# Altium PCB Control_Board_Model_C201_FFC_Sens_Conn.PcbDoc (part 10 of 12)
Units mil, origin at the board's own origin, x right, y up, seen from the top; angles counter-clockwise.
Board outline 3937.01 x 2755.91 mil, 6 copper layers (1-SIG-TOP, 2-GND, 3-PWR, 4-SIG-HOR, 5-SIG-VERT, 6-GND-BOT), stack 46.063 mil thick; 497 components, 379 nets, 1804 pads, 1610 vias.
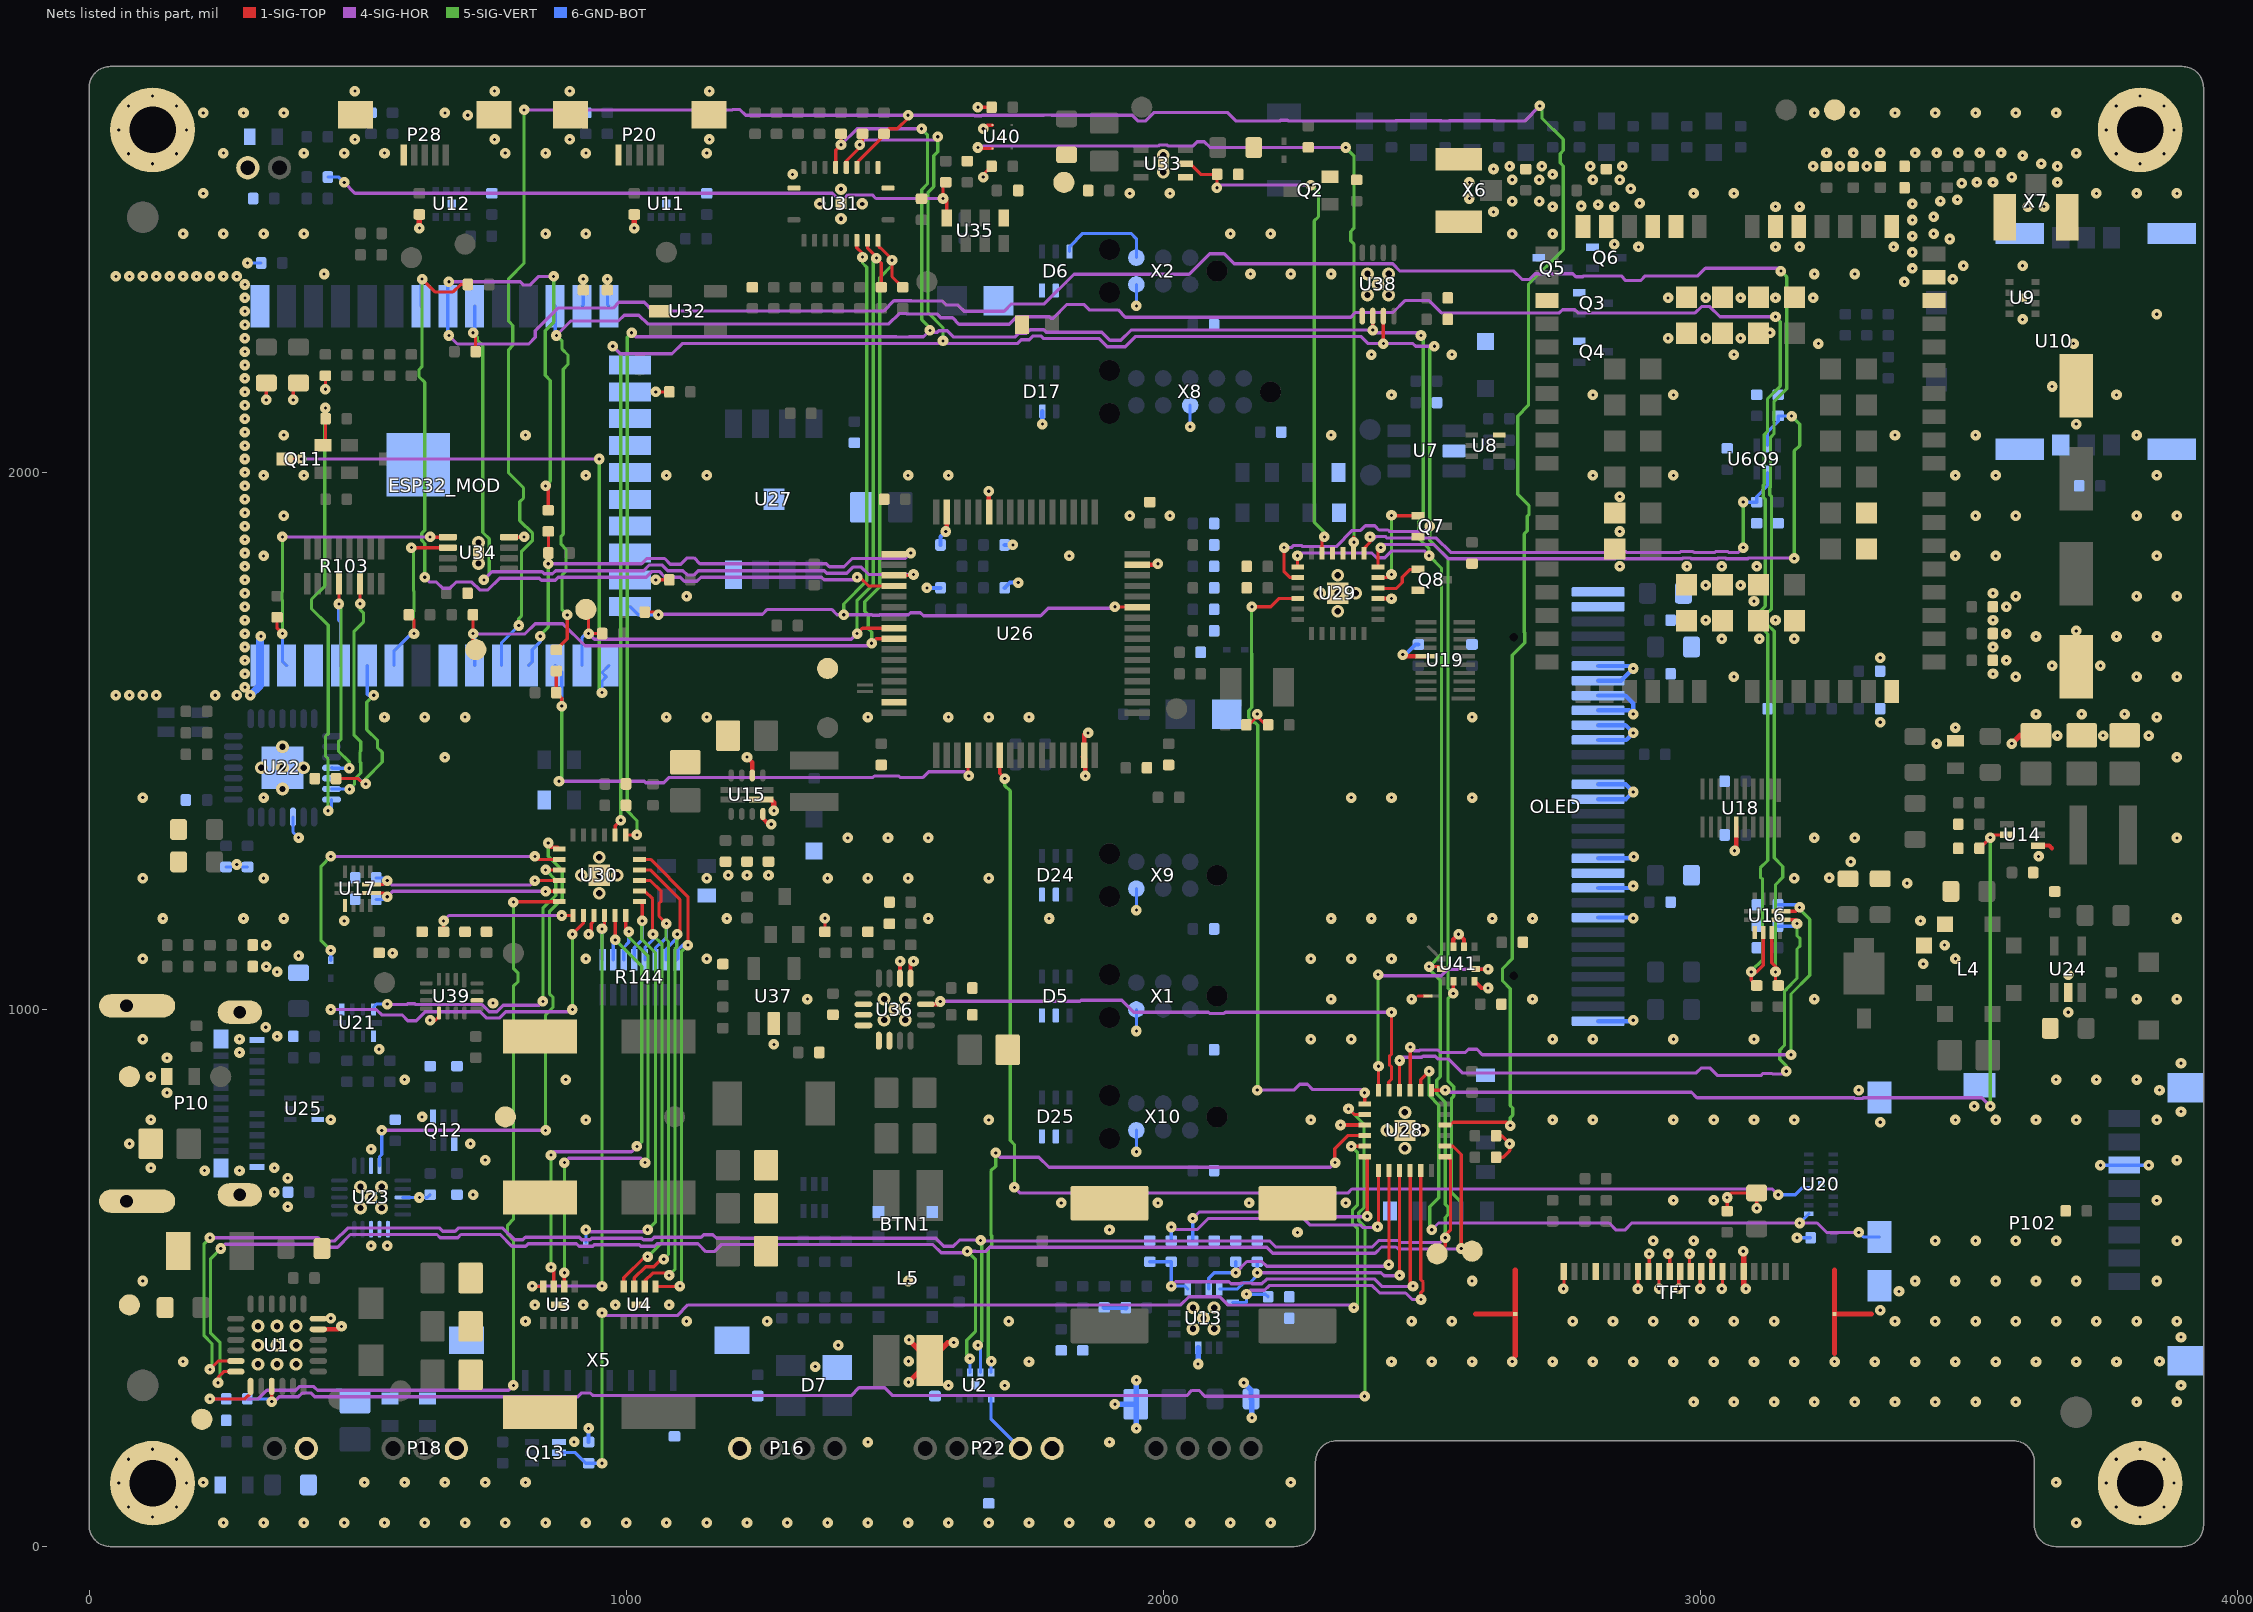
[diagram p9: the nets of this part, all layers, seen from the top]

## Via types
v1: diameter 19.68, hole 5.91, 1-SIG-TOP to 6-GND-BOT, tented both sides, 1553 vias
v2: diameter 23.81, hole 11.81, 1-SIG-TOP to 6-GND-BOT, tented both sides, 27 vias
v3: diameter 23.82, hole 11.81, 1-SIG-TOP to 6-GND-BOT, tented both sides, 26 vias
v4: diameter 21.65, hole 7.87, 1-SIG-TOP to 6-GND-BOT, tented both sides, 4 vias

## Nets (pads, with @x,y where several pads share a name; then routed paths per layer and width w, separated by ;. In a path a pad name is that pad's centre, name@x,y a point inside that pad or via, vN(x,y) a via of type N, cw(c..) or ccw(c..) an arc to the next point about the centre after c; other vN are vias at no path point) (continued)
DEBUG.RTS/TDO: D6.6 X2.6 | length 183
  6-GND-BOT w6: D6.6@1825.59,2411.22 1825.59,2420.59 1850,2445 1940,2445 1950,2435 X2.6@1950,2400
DIO_1_0: R97.2 U14.2 U28.1 | length 1617
  1-SIG-TOP w6: U28.1@2499.21,849.8 2524.8,849.8 v1(2525,850) ; R97.2@3519.68,1300 3519.68,1299.68 v1(3540,1320) 3540,1320.32 3544.68,1325 U14.2@3571.06,1325
  4-SIG-HOR w6: v1(2525,850) 2529.16,845.84 2983.63,845.84 2993.68,835.8 3286.87,835.8 3288.46,834.2 3301.54,834.2 3303.13,835.8 3524.2,835.8 v1(3540,820)
  5-SIG-VERT w6: v1(3540,820) v1(3540,1320)
DIO_1_1: P102.9 U20.1 U28.2 | length 1238.5
  1-SIG-TOP w6: U28.2@2479.53,849.8 2479.53,869.53 v1(2495,885)
  4-SIG-HOR w6: v1(2500,590) 2512.52,602.52 2830.14,602.52 2843.46,589.2 2859.2,589.2 2872.52,602.52 v1(3185,602.52) 3217.48,602.52 3235,585 3242.66,585 3243.46,584.2 3256.54,584.2 3257.34,585 v1(3295,585)
  5-SIG-VERT w6: v1(2495,885) 2495,840 2513,822 2513,649.65 2496.16,632.8 2496.16,593.84 v1(2500,590)
  6-GND-BOT w6: v1(3185,602.52) U20.1@3202.36,619.88 ; v1(3295,585) 3303.62,576.38 P102.9@3333.66,576.38
DIO_1_2: R38.1 U16.2 U28.3 | length 1177.5
  1-SIG-TOP w6: U28.3@2459.84,849.8 2460,849.96 v1(2460,930) ; U16.2@3150.59,1182.87 3177.87,1182.87 v1(3185,1190)
  4-SIG-HOR w6: v1(2460,930) 2466.83,923.17 2476.89,923.17 2478.52,924.8 2511.48,924.8 2516.28,920 2562.66,920 2568.46,925.8 2584.2,925.8 2594.32,915.68 v1(3168.84,915.68)
  5-SIG-VERT w6: v1(3168.84,915.68) 3168.84,1028.84 3203.84,1063.84 3203.84,1167.8 3185,1186.65 v1(3185,1190)
  6-GND-BOT w6: R38.1@3144.68,1195 3180,1195 v1(3185,1190)
DIO_1_3: R37.1 U16.1 U28.4 | length 1178.6
  1-SIG-TOP w6: v1(2440,905) 2440,894.68 2440.16,894.84 U28.4@2440.16,849.8 ; U16.1@3150.59,1167.13 3177.87,1167.13 3180,1165 v1(3180,1160)
  4-SIG-HOR w6: v1(2440,905) 2446.17,911.17 2481.86,911.17 2483.49,912.8 2506.51,912.8 2511.31,908 2530.42,908 2556.42,882 2992.52,882 3001.37,890.84 3018.63,890.84 3032.48,877 3112.52,877 3116.37,880.84 3133.63,880.84 3134.48,880 3155,880 v1(3160,885)
  5-SIG-VERT w6: v1(3160,885) 3160,895.05 3148,907.05 3148,924.32 3156.84,933.16 3156.84,1033.81 3160,1036.97 3160,1038.03 3180,1058.03 3180,1112.66 3185.8,1118.46 3185.8,1131.54 3180,1137.34 v1(3180,1160)
  6-GND-BOT w6: R37.1@3144.68,1155 3180,1155 v1(3180,1160)
DIO_1_4: U28.5 U36.3 | length 1031.9
  1-SIG-TOP w6: U28.5@2420.47,849.8 2420,850.28 2420,865 2425,870 2425,893.35 2421.16,897.2 2421.16,912.8 2425,916.65 v1(2425,995)
  1-SIG-TOP w8: U36.3@1558.07,1009.84 1579.84,1009.84 v1(1584.92,1014.92)
  4-SIG-HOR w6: v1(1584.92,1014.92) 1585.5,1015.5 1845,1015.5 1846.84,1017.34 1922.66,1017.34 1945,995 2084.26,995 2086.6,992.66 2113.4,992.66 2115.74,995 v1(2425,995)
DIO_1_5: U28.6 U41.5 | length 448.9
  1-SIG-TOP w6: U28.6@2400.79,849.8 v1(2400.79,894.21) ; U41.5@2582.09,1075.16 v1(2604.84,1075.16)
  4-SIG-HOR w6: v1(2400,1065) 2401.95,1063.05 2518.05,1063.05 2530.16,1075.16 v1(2604.84,1075.16)
  5-SIG-VERT w6: v1(2400,1065) 2400,895 v1(2400.79,894.21)
DIO_1_6: U28.7 U29.22 | length 1235.2
  1-SIG-TOP w6: v1(2165,1750) 2200,1750 2215.16,1765.16 U29.22@2250.2,1765.16 ; v1(2375,845) 2375.2,844.8 U28.7@2375.2,824.21
  4-SIG-HOR w6: v1(2175,850) 2243.37,850 2254.22,860.84 2268.63,860.84 2278.52,850.95 2369.05,850.95 v1(2375,845)
  5-SIG-VERT w6: v1(2165,1750) 2164.2,1749.2 2164.2,1663.46 2165,1662.66 2165,1562.34 2159.2,1556.54 2159.2,1543.46 2168.46,1534.2 2171.06,1534.2 2175.84,1529.43 2175.84,850.84 v1(2175,850)
DIO_1_7: R1.1 U1.9 U28.8 | length 2736.9
  1-SIG-TOP w6: v1(340,270) 340.16,269.84 U1.9@340.16,298.23 U1.9@340.16,298.82 ; v1(2345,815) 2355.47,804.53 U28.8@2375.2,804.53
  4-SIG-HOR w6: v1(340,270) 345,270 354.16,279.16 389.68,279.16 396.37,285.84 413.63,285.84 420.32,279.16 909.68,279.16 916.37,285.84 933.63,285.84 938.32,281.16 1418.82,281.16 1433.46,295.8 1481.54,295.8 1496.18,281.16 2043.82,281.16 2053.46,290.8 2066.54,290.8 2077.34,280 v1(2375,280)
  5-SIG-VERT w6: v1(2345,815) 2373.84,786.16 2373.84,631.18 2364.2,621.54 2364.2,606.64 2375.84,595 2375.84,280.84 v1(2375,280)
  6-GND-BOT w6: R1.1@294.69,275 335,275 v1(340,270)
DIO_1_8: U2.8 U28.10 | length 1157.6
  1-SIG-TOP w6: v1(2320,715) 2319.32,715.68 2319.32,740.96 2343.51,765.16 U28.10@2375.2,765.16
  4-SIG-HOR w6: v1(1688,733) 1696,725 1768.42,725 1787.26,706.16 2311.16,706.16 v1(2320,715)
  5-SIG-VERT w6: v1(1680,345) 1674.2,350.8 1674.2,554.73 1680.84,561.37 1680.84,578.63 1679.16,580.32 1679.16,699.48 1688,708.32 v1(1688,733)
  6-GND-BOT w6: U2.8@1679.53,324.02 1679.53,344.53 v1(1680,345)
DIO_1_9: Q13.2 R138.2 U28.11 | length 2134.3
  1-SIG-TOP w6: v1@2349.53,745.47 U28.11@2375.2,745.47
  4-SIG-HOR w6: v1(955,435) 960,430 1095,430 1115,450 2032.98,450 2047.98,465 2105,465 2120,450 2350,450 v1(2355,445)
  5-SIG-VERT w6: v1(955,155) v1(955,435) ; v1(2350,745) 2361.84,733.16 2361.84,636.15 2352.2,626.51 2352.2,601.67 2361.84,592.03 2361.84,451.84 v1(2355,445)
  6-GND-BOT w6: Q13.2@875.2,175 905,175 924.69,155.32 R138.2@930,155.32 954.69,155.32 v1(955,155)
DIO_1_10: R79.2 U28.12 | length 488.3
  1-SIG-TOP w6: U28.12@2375.2,725.79 2380,720.98 v1(2380,615)
  4-SIG-HOR w6: v1(2055,611.15) 2066.8,622.95 2265.72,622.95 2274.72,613.95 2378.95,613.95 v1(2380,615)
  6-GND-BOT w6: R79.2@2055,569.68 v1(2055,611.15)
DIO_1_11: R80.2 U28.13 | length 542.3
  1-SIG-TOP w6: v1(2398.94,595.59) 2398.94,592.63 2400.79,590.79 U28.13@2400.79,700.2
  4-SIG-HOR w6: v1(2015,595) 2019.69,590.31 2063.63,590.31 2084.28,610.95 2260.75,610.95 2272.75,598.95 2366.57,598.95 2371.37,594.16 2397.51,594.16 v1(2398.94,595.59)
  6-GND-BOT w6: R80.2@2015,569.68 v1(2015,595)
DIO_1_12: R88.2 U13.15 U28.14 | length 568.3
  1-SIG-TOP w6: v1@2420.47,525.47 U28.14@2420.47,700.2
  4-SIG-HOR w6: v1(2135,510) 2155.84,530.84 2183.63,530.84 2192.48,522 2417,522 v1(2420,525)
  6-GND-BOT w6: U13.15@2084.84,479.53 2084.84,499.84 2095,510 v1(2135,510) R88.2@2135,530.32
DIO_1_13: R87.2 U13.16 U28.15 | length 569.3
  1-SIG-TOP w6: v1@2440.16,505 U28.15@2440.16,700.2
  4-SIG-HOR w6: v1(2175,510) 2405.52,510 2411.37,504.16 2439.16,504.16 v1(2440,505)
  6-GND-BOT w6: U13.16@2104.53,479.53 2137.88,479.53 2149.86,491.51 2161.51,491.51 2175,505 v1(2175,510) R87.2@2175,530.32
DIO_1_14: C50.2 R80.1 U13.13 U28.16 | length 804.3
  1-SIG-TOP w6: v1@2459.84,480 U28.16@2459.84,700.2
  4-SIG-HOR w6: v1(2015,485) 2023,493 2122.52,493 2126.37,489.16 2144.68,489.16 2146.37,490.84 2163.63,490.84 2165.32,489.16 2183.63,489.16 2192.48,498 2393.97,498 2407.81,484.16 2464.16,484.16 v1(2465,485)
  6-GND-BOT w6: C50.2@1975,530.32 R80.1@2015,530.32 v1(2015,485) 2040,485 U13.13@2045.47,479.53
DIO_1_15: R85.2 U13.1 U28.17 | length 669.4
  1-SIG-TOP w6: U28.17@2479.53,700.2 2479.53,497.12 2483.84,492.8 2483.84,477.2 2479.53,472.88 2479.53,460.47 v1(2480,460)
  4-SIG-HOR w6: v1(2155,470) 2162.16,477.16 2188.6,477.16 2197.45,486 2389,486 2402.84,472.16 2451.22,472.16 2463.37,460 v1(2480,460)
  6-GND-BOT w6: U13.1@2129.53,454.53 2154.53,454.53 2155,455 v1(2155,470) 2190.31,470 R85.2@2195.31,465
DIO_2_8: Q8.1 U29.10 | length 95.6
  1-SIG-TOP w6: U29.10@2399.8,1784.84 2400.8,1783.84 2433.84,1783.84 2445,1795 2445,1804.9 2459.6,1819.5 Q8.1@2474.41,1819.5
DIO_2_9: Q7.1 U29.11 | length 187.1
  1-SIG-TOP w6: U29.11@2399.8,1804.53 2419.53,1804.53 v1(2425,1810) ; v1(2425,1920) 2425.5,1919.5 Q7.1@2474.41,1919.5
  5-SIG-VERT w6: v1(2425,1810) v1(2425,1920)
DIO_2_10: Q9.5 R58.2 U29.12 | length 1190.4
  1-SIG-TOP w6: U29.12@2399.8,1824.21 2399.8,1854.8 v1(2405,1860)
  4-SIG-HOR w6: v1(2405,1860) 2410.84,1865.84 2503.63,1865.84 2530.32,1839.16 2841.82,1839.16 2843.46,1840.8 2856.54,1840.8 2858.18,1839.16 2966.82,1839.16 2968.46,1840.8 2981.54,1840.8 2983.18,1839.16 3031.82,1839.16 3033.46,1840.8 3046.54,1840.8 3048.18,1839.16 3088.63,1839.16 3090.27,1840.8 3174.2,1840.8 v1(3175,1840)
  5-SIG-VERT w6: v1(3170,2105) 3185,2090 3185,2050 3175,2040 v1(3175,1840)
  6-GND-BOT w6: Q9.5@3125,2050.2 3125,2075 3145,2095 R58.2@3145,2105.32 3169.68,2105.32 v1(3170,2105)
DIO_2_11: Q9.2 R56.2 U29.13 | length 927.9
  1-SIG-TOP w6: U29.13@2374.21,1849.8 2374.21,1859.21 2385,1870 v1(2385,1880)
  4-SIG-HOR w6: v1(2385,1880) 2390.26,1874.74 2396.37,1880.84 2413.63,1880.84 2416.63,1877.84 2508.6,1877.84 2535.29,1851.16 2836.85,1851.16 2838.49,1852.8 2861.51,1852.8 2863.15,1851.16 2961.85,1851.16 2963.49,1852.8 2986.51,1852.8 2988.15,1851.16 3026.85,1851.16 3028.49,1852.8 3051.51,1852.8 3053.15,1851.16 3071.16,1851.16 v1(3080,1860)
  5-SIG-VERT w6: v1(3080,1860) v1(3080,1945)
  6-GND-BOT w6: v1(3080,1945) 3080.32,1944.68 R56.2@3105,1944.68 3105,1955 3125,1975 Q9.2@3125,1999.8
DIO_2_12: U29.14 U40.3 | length 1508.7
  1-SIG-TOP w6: v1(1655,2605) 1656.65,2603.35 U40.3@1682.09,2603.35 ; U29.14@2354.53,1849.8 2354.53,1879.53 2355,1879.06 v1(2355,1870)
  4-SIG-HOR w6: v1(1655,2605) 1657.66,2607.66 1990.39,2607.66 1992.24,2609.5 2007.77,2609.5 2009.61,2607.66 2055,2607.66 2063.13,2615.8 2076.54,2615.8 2087.34,2605 v1(2340,2605)
  5-SIG-VERT w6: v1(2340,2605) 2355,2590 2355,2454.48 2349.16,2448.63 2349.16,2431.37 2355,2425.52 v1(2355,1870)
DIO_2_13: U29.15
DIO_2_14: U29.16
DIO_2_15: R157.1 U29.17 U33.5 | length 985.3
  1-SIG-TOP w6: U33.5@2041.34,2575.01 2049.99,2575.01 2070,2555 R157.1@2100.31,2555 2100.31,2525.32 2100,2525.63 v1(2100,2530) ; U29.17@2295.47,1849.8 2295.47,1879.53 2295.94,1880 v1(2300,1880)
  4-SIG-HOR w6: v1(2100,2530) 2105,2535 v1(2275,2535)
  5-SIG-VERT w6: v1(2275,2535) 2289.16,2520.84 2289.16,2476.37 2281.16,2468.37 2281.16,1907.46 2300,1888.62 v1(2300,1880)
DIO_3_0: U23.9 U30.1 | length 964.4
  1-SIG-TOP w6: v1(855,1310) 855,1305 858,1302 872.41,1302 U30.1@875.2,1299.21
  4-SIG-HOR w6: v1(545,775) v1(850,775)
  5-SIG-VERT w6: v1(850,775) 850,990 863.83,1003.83 863.83,1022.8 857,1029.63 857,1182 880.83,1205.83 880.83,1259.17 855,1285 v1(855,1310)
  6-GND-BOT w6: U23.9@540.75,709.06 540.75,725.75 545,730 v1(545,775)
DIO_3_1: D22.2 U30.2 | length 635.8
  1-SIG-TOP w6: v1(830,1285) 835.47,1279.53 U30.2@875.2,1279.53
  4-SIG-HOR w6: v1(450,1285) v1(830,1285)
  5-SIG-VERT w6: v1(450,1110) 432,1128 432,1267 v1(450,1285)
  6-GND-BOT w6: D22.2@450,1091.54 v1(450,1110)
DIO_3_2: U21.4 U30.3 | length 625.2
  1-SIG-TOP w6: v1(850,1260) 875.04,1260 U30.3@875.2,1259.84
  4-SIG-HOR w6: v1(555,1010) 555.8,1009.2 591.87,1009.2 593.46,1010.8 606.54,1010.8 608.13,1009.2 731.8,1009.2 745,996 759,996 771,1008 838,1008 v1(845,1015)
  5-SIG-VERT w6: v1(845,1015) 845,1188.37 868.83,1212.2 868.83,1241.17 v1(850,1260)
  6-GND-BOT w6: U21.4@529.53,1000 529.53,1004.53 535,1010 v1(555,1010)
DIO_3_3: R124.1 U17.2 U30.4 | length 381.6
  1-SIG-TOP w6: U17.2@525.59,1232.87 547.87,1232.87 v1(555,1240) ; v1(830,1240) 830.16,1240.16 U30.4@875.2,1240.16
  4-SIG-HOR w6: v1(555,1240) 563,1232 822,1232 v1(830,1240)
  6-GND-BOT w6: R124.1@534.69,1245 550,1245 v1(555,1240)
DIO_3_4: R123.1 U17.1 U30.5 | length 379.3
  1-SIG-TOP w6: U17.1@525.59,1217.13 547.87,1217.13 v1(555,1210) ; v1(850,1220) 874.72,1220 U30.5@875.2,1220.47
  4-SIG-HOR w6: v1(555,1210) 565,1220 v1(850,1220)
  6-GND-BOT w6: R123.1@534.69,1205 550,1205 v1(555,1210)
DIO_3_5: U1.7 U30.6 | length 1676
  1-SIG-TOP w6: v1(225,275) 290,275 300.79,285.79 U1.7@300.79,298.23 U1.7@300.79,298.82 ; v1(790,1200) 790.79,1200.79 U30.6@875.2,1200.79
  4-SIG-HOR w6: v1(225,275) 315,275 331.16,291.16 384.71,291.16 391.4,297.84 418.6,297.84 425.29,291.16 781.16,291.16 v1(790,300)
  5-SIG-VERT w6: v1(790,300) 790,570.52 779.16,581.37 779.16,598.63 790,609.48 790,1043.37 798.83,1052.2 798.83,1067.8 790,1076.63 v1(790,1200)
DIO_3_6: R128.1 U30.7 | length 265.3
  1-SIG-TOP w6: R128.1@660,1144.68 v1(660,1165) ; v1(880,1175) 900.59,1175 U30.7@900.79,1175.2
  4-SIG-HOR w6: v1(660,1165) 670,1175 v1(880,1175)
DIO_3_7: U21.1 U30.8 | length 681.1
  1-SIG-TOP w6: v1(900,1140) 920.47,1160.47 U30.8@920.47,1175.2
  4-SIG-HOR w6: v1(450,1000) 535,1000 545,990 582.66,990 593.46,979.2 609.2,979.2 625.8,995.8 728.23,995.8 740.03,984 763.97,984 775.77,995.8 895.8,995.8 v1(900,1000)
  5-SIG-VERT w6: v1(900,1000) v1(900,1140)
  6-GND-BOT w6: v1(450,1000) U21.1@470.47,1000
DIO_3_8: R144.1 U3.8 U30.10 | length 901
  1-SIG-TOP w6: v1(825,485) 825.94,484.06 U3.8@845.47,484.06 ; v1(955,1150) 959.84,1154.84 U30.10@959.84,1175.2
  4-SIG-HOR w6: v1(825,485) v1(955,485)
  5-SIG-VERT w6: v1(955,485) v1(955,1150)
  6-GND-BOT w6: v1(955,1150) 955,1093.6 R144.1@956.1,1092.5
DIO_3_9: R144.2 U3.7 U30.11 | length 906.5
  1-SIG-TOP w6: v1(860,520) 865.16,514.84 U3.7@865.16,484.06 ; v1(979.53,1129.53) U30.11@979.53,1175.2
  4-SIG-HOR w6: v1(860,728.86) 866.14,735 1010,735 v1(1020,745)
  5-SIG-VERT w6: v1(860,520) v1(860,728.86) ; v1(979.53,1129.53) 1028.84,1080.21 1028.84,753.84 v1(1020,745)
  6-GND-BOT w6: R144.2@975.79,1092.5 975.79,1125.79 v1(979.53,1129.53)
DIO_3_10: R144.3 U3.6 U30.12 | length 923.9
  1-SIG-TOP w6: U3.6@884.84,484.06 884.84,509.84 v1(885,510) ; U30.12@999.21,1175.2 999.21,1150.79 v1(1005,1145)
  4-SIG-HOR w6: v1(885,715) 893,723 1027,723 v1(1035,715)
  5-SIG-VERT w6: v1(885,510) v1(885,715) ; v1(1005,1145) 1005,1135 1040.84,1099.16 1040.84,720.84 v1(1035,715)
  6-GND-BOT w6: R144.3@995.47,1092.5 995.47,1115.47 1005,1125 v1(1005,1145)
DIO_3_11: D10.2 R144.4 U30.13 | length 850.5
  1-SIG-TOP w6: U30.13@1024.8,1200.79 1030,1195.59 v1(1030,1165)
  4-SIG-HOR w6: v1(925,590) 928.84,586.16 1036.16,586.16 v1(1040,590)
  5-SIG-VERT w6: v1(1030,1165) 1029.16,1164.16 1029.16,1130.84 1054.84,1105.16 1054.84,604.84 v1(1040,590)
  6-GND-BOT w6: D10.2@925,566.54 v1(925,590) ; R144.4@1015.16,1092.5 1015,1092.66 1015,1115 1030,1130 v1(1030,1165)
DIO_3_12: R144.5 U4.8 U30.14 | length 849.9
  1-SIG-TOP w6: U4.8@995.47,484.06 995.47,500.47 1035,540 v1(1040,540) ; U30.14@1024.8,1220.47 1034.53,1220.47 1049.16,1205.84 1049.16,1140.84 v1(1050,1140)
  5-SIG-VERT w6: v1(1040,540) 1066.84,566.84 1066.84,1121.71 1050,1138.55 v1(1050,1140)
  6-GND-BOT w6: R144.5@1034.84,1092.5 1034.84,1114.84 1055,1135 v1(1050,1140)
DIO_3_13: R144.6 U4.7 U30.15 | length 909.1
  1-SIG-TOP w6: U4.7@1015.16,484.06 1015.16,500.16 1036.16,521.16 1051.16,521.16 1065,535 v1(1070,535) ; U30.15@1024.8,1240.16 1044.84,1240.16 1065,1220 1065,1201.65 1061.16,1197.8 1061.16,1173.84 v1(1075,1160)
  5-SIG-VERT w6: v1(1070,535) 1078.84,543.84 1078.84,1126.68 1074.16,1131.37 1074.16,1159.16 v1(1075,1160)
  6-GND-BOT w6: R144.6@1054.53,1092.5 1054.53,1114.53 1061.16,1121.16 1062.8,1121.16 1075,1133.35 v1(1075,1160)
DIO_3_14: R144.7 U4.6 U30.16 | length 927.8
  1-SIG-TOP w6: U30.16@1024.8,1259.84 1045.16,1259.84 1100,1205 1100,1145 v1(1095,1140) ; U4.6@1034.84,484.06 1034.84,494.84 1049.16,509.16 1079.16,509.16 1080,508.32 v1(1080,505)
  5-SIG-VERT w6: v1(1080,505) 1090.84,515.84 1090.84,1112.81 1094.16,1116.13 1094.16,1128.63 1095,1129.48 v1(1095,1140)
  6-GND-BOT w6: R144.7@1074.21,1092.5 1074.21,1112.57 1095,1133.35 v1(1095,1140)
DIO_3_15: R144.8 U4.5 U30.17 | length 938.2
  1-SIG-TOP w6: U30.17@1024.8,1279.53 1045.47,1279.53 1115,1210 v1(1115,1120) ; U4.5@1054.53,484.06 1099.06,484.06 v1(1100,485)
  5-SIG-VERT w6: v1(1100,485) 1102.84,487.84 1102.84,1107.84 v1(1115,1120)
  6-GND-BOT w6: R144.8@1093.9,1092.5 1095.84,1094.44 1095.84,1110.84 1105,1120 v1(1115,1120)
DIR_OUT: P22.4 U2.1 | length 115.9
  6-GND-BOT w6: U2.1@1679.53,275.98 1679.53,237.2 P22.4@1734.06,182.68
DISP.TE: TFT.19
DSR: R103.6 U22.27 | length 441.8
  1-SIG-TOP w6: v1(504.53,1755.47) R103.6@504.53,1792.5
  5-SIG-VERT w6: v1(485,1410) 494.16,1419.16 494.16,1428.63 505.84,1440.32 505.84,1459.68 504.16,1461.37 504.16,1479.68 505.84,1481.37 505.84,1498.63 493.16,1511.32 493.16,1703.68 510.84,1721.37 510.84,1738.63 504.16,1745.32 504.16,1755.1 v1(504.53,1755.47)
  6-GND-BOT w6: U22.27@451.5,1410.63 484.37,1410.63 v1(485,1410)
DTR: Q11.2 R62.1 U22.28 | length 889.9
  1-SIG-TOP w6: Q11.2@435.43,2050.58 440.31,2055.47 R62.1@440.31,2100 440.31,2124.68 440,2124.37 v1(440,2120)
  5-SIG-VERT w6: v1(440,2120) 440,2122.68 438.84,2123.84 438.84,1788.32 414.16,1763.63 414.16,1746.37 445.16,1715.37 445.16,1513.57 440.16,1508.57 440.16,1471.43 445,1466.58 v1(445,1370)
  6-GND-BOT w6: v1(445,1370) 451.5,1376.5 U22.28@451.5,1390.94
EVI: R30.2 R161.2 U35.8 | length 1242
  1-SIG-TOP w6: R161.2@1595,2540.32 1590,2535.32 v1(1590,2510) 1595,2510 1596.85,2508.15 U35.8@1596.85,2473.62
  4-SIG-HOR w6: v1(475,2540) 495,2520 1383.83,2520 1393.83,2510 1406.17,2510 1412.95,2516.78 1458.22,2516.78 1465,2510 v1(1590,2510)
  6-GND-BOT w6: R30.2@444.69,2550 465,2550 v1(475,2540)
GND: B1.2 BTN1.2 C1.1 C3.1 C4.1 C5.1 C6.1 C7.1 C8.1 C9.1 C10.1 C11.1 C12.1 C13.2 C14.2 C15.2 C16.1 C17.2 C18.1 C19.2 C20.2 C21.2 C22.2 C23.1 C24.1 C25.2 C26.2 C27.2 C28.1 C29.2 C30.1 C31.2 C32.1 C33.1 C34.1 C35.1 C36.1 C38.1 C39.1 C40.1 C41.1 C42.1 C43.1 C44.2 C45.2 C46.1 C47.1 C48.1 C49.1 C50.1 C51.1 C52.1 C53.1 C54.2 C55.2 C56.1 C57.2 C58.2 C59.1 C60.1 C61.2 C62.1 C63.1 C64.2 C65.1 C66.1 C67.1 C68.2 C69.1 C70.2 C71.1 C72.1 C73.2 C74.2 C75.1 C76.1 C77.1 C78.1 C79.2 C80.2 C81.2 C82.2 C84.1 C85.2 C87.2 C88.1 C89.1 C90.1 C91.2 C93.1 C94.2 C95.1 C96.2 C97.1 C98.2 C99.2 C100.2 C101.2 C102.2 C103.2 C104.1 C105.1 C106.1 C107.1 C108.2 C109.1 C110.1 C111.1 C112.1 C113.2 C114.2 C115.2 C116.2 C117.2 C118.2 C119.2 C120.1 C121.2 C122.2 C123.2 C124.2 C125.1 C126.1 C127.2 C128.1 C129.1 C130.1 C131.1 C132.1 C133.1 C136.1 C137.1 C138.1 C139.1 C140.1 C141.1 C142.1 C143.2 C144.2 C145.1 C146.1 C147.1 C148.2 D1.2 D2.2 D3.2 D5.2 D5.3 D6.2 D6.3 D7.1 D9.2 D12.2 D16.2 D17.2 D18.1 D21.2 D24.2 D24.3 D25.2 D25.3 ESP32_MOD.1 ESP32_MOD.15 ESP32_MOD.38 ESP32_MOD.39 J1.1 J3.1 J5.1 J7.1 J9.1 J11.1 J13.1 L4.1 L5.4 MNT1.1 MNT2.1 MNT3.1 MNT4.1 NT4.2 OLED.1 OLED.8 OLED.10 OLED.11 OLED.12 OLED.16 OLED.17 OLED.20 OLED.21 OLED.22 OLED.23 OLED.24 OLED.25 OLED.29 OLED.30 P10.A1 P10.A12 P10.B1 P10.B12 P10.S1 P10.S2 P10.S3 P10.S4 P16.1 P18.3 P19.1.2 P19.2 P20.0 P20.5 P22.5 P28.0 P28.5 P102.0 P102.6 P102.10 Q2.2 Q3.2 Q4.2 Q5.2 Q6.2 Q7.2 Q8.2 Q12.1 Q12.4 Q13.1 R1.2 R2.1 R31.2 R36.1 R37.2 R38.2 R54.1 R55.2 R56.1 R57.2 R58.1 R82.1 R84.1 R85.1 R86.1 R87.1 R88.1 R89.1 R90.1 R97.1 R98.1 R100.1 R107.2 R108.1 R110.2 R112.1 R114.1 R115.1 R117.2 R120.2 R122.2 R123.2 R124.2 R136.1 R137.1 R138.1 R140.1 R157.2 R162.1 R164.2 R165.2 R166.1 TFT.5 TFT.7 TFT.8 TFT.9 TFT.10 TFT.11 TFT.12 TFT.13 TFT.14 TFT.15 TFT.22 TFT.23 TFT.24 TP18.1 TP19.1 TP20.1 TP21.1 TP22.1 TP23.1 TP24.1 U1.17 U1.18 U1.25 U2.9 U3.GP U4.GP U6.3 U6.31 U6.47 U6.48 U6.50 U6.54 U6.55 U6.58 U6.59 U6.61 U6.62 U6.67 U6.68 U6.69 U6.70 U6.71 U6.72 U6.73 U6.74 U6.79 U6.80 U6.81 U6.82 U6.89 U6.90 U6.91 U6.100 U6.101 U6.102 U7.2 U8.3 U9.9 U10.G1 U10.G2 U10.G3 U10.G4 U10.S4 U11.9 U12.9 U13.7 U13.17 U14.4 U15.1 U15.4 U15.11 U16.9 U17.9 U18.15 U19.15 U20.17 U21.6 U22.3 U22.29 U23.8 U23.13 U23.16 U23.17 U23.18 U23.21 U24.2 U25.3 U26.15 U26.27 U26.31 U26.47 U26.63 U27.4 U27.9 U28.9 U28.EP U29.9 U29.EP U30.9 U30.EP U31.1 U31.2 U31.10 U31.21 U32.2 U33.4 U33.7 U34.4 U34.9 U35.5 U36.5 U36.6 U36.10 U36.11 U36.12 U36.13 U36.14 U36.17 U37.2 U38.5 U38.9 U39.9 U39.14 U40.2 U40.5 U41.4 U41.8 U41.9 X1.5 X2.5 X4.2 X5.MP1 X5.MP2 X6.1 X6.3 X7.1 X7.3 X8.3 X9.5 X10.5 | length 4333.9
  1-SIG-TOP w6: v1(330,2135) C41.1@330,2166.54 ; v1(380,2135) 380,2156.54 C42.1@390,2166.54 C42.1@390,2172.44 ; v1(440,2155) C40.1@440,2180.32 ; v1(635,980) 645,980 651.38,986.38 U39.9@651.38,993.5 ; U34.4@784.04,1879.53 809.53,1879.53 v1(810,1880) ; v1(930,1140) 935,1145 935,1160 940.16,1165.16 U30.9@940.16,1175.2 ; R166.1@1370,1144.68 v1(1370,1170) ; v1(1655,2680) C146.1@1680.31,2680 ; v1(1665,2550) 1665,2554.68 C145.1@1680.31,2570 ; v1(1665,2640) 1671.65,2646.65 U40.2@1682.09,2646.65 ; C12.1@2154.69,1530 2154.69,1525.32 v1@2175,1545.63 ; v1(2175,1550) v1@2175,1545.63 ; C11.1@2195.31,1530 2195.31,1525.32 v1@2175,1545.63 ; 2475,1025 NT4.2@2493,1025 ; C113.2@2619.68,725 2632.75,725 2645,737.25 v1(2645,750) 2630,765 C114.2@2619.68,765 ; v1(2745,480) 2746.06,481.06 TFT.22@2746.06,511.81 ; v1(2883.86,480) TFT.15@2883.86,511.81 ; TFT.14@2903.54,511.81 2905,513.27 v1(2905,545) ; v1(2923.23,480) TFT.13@2923.23,511.81 ; v1(2940,545) 2940.83,545 2942.91,542.91 TFT.12@2942.91,511.81 ; v1(2960,480) 2960,509.21 TFT.11@2962.6,511.81 ; v1(2980,545) 2980,514.09 TFT.10@2982.28,511.81 ; v1(3000,480) 3000,509.84 TFT.9@3001.97,511.81 ; v1(3020,545) 3020,513.46 TFT.8@3021.65,511.81 ; v1(3040,480) 3041.34,481.34 TFT.7@3041.34,511.81 ; C80.2@3050,624.68 v1(3050,650) 3058.46,658.46 C79.2@3105,658.46 v1(3105,630)
  1-SIG-TOP w8: U1.17@426.18,404.53 U1.17@426.77,404.53 464.53,404.53 v1(470,410) ; U1.18@426.18,424.21 U1.18@426.77,424.21 449.21,424.21 v1(450,425) ; v1(1225,1470) 1234.84,1460.16 U15.4@1234.84,1435.93 ; U15.11@1254.53,1364.07 1254.53,1355.47 1265,1345 v1(1270,1345) ; U36.6@1509.84,1058.07 1509.84,1089.84 v1(1510,1090) ; U36.5@1529.53,1058.07 1529.53,1084.53 v1(1535,1090) ; v1(1595,1890) 1597.05,1892.05 U26.31@1597.05,1926.38 ; v1(1675,1965) 1675,1927.17 U26.27@1675.79,1926.38 ; v1(1855,1435) 1855,1465.67 1850,1470.67 U26.63@1852.95,1473.62 1852.95,1512.05 1855.91,1515 v1(1860,1515) ; U26.15@1951.38,1827.95 1987.95,1827.95 v1(1990,1830) ; v1(2330,785) 2375.04,785 U28.9@2375.2,784.84 ; U29.9@2399.8,1765.16 2424.84,1765.16 v1(2425,1765) ; v1(2445.82,1660.82) 2449.18,1660.82 2452.13,1657.87 U19.15@2489.57,1657.87 ; U41.9@2540.16,1117.09 2540.16,1130.16 v1(2550,1140) 2559.84,1130.16 U41.8@2559.84,1117.09 ; U41.4@2579.53,1052.91 2592.44,1040 v1(2605,1040) ; v1(3063.84,1295.7) 3067.13,1298.98 U18.15@3067.13,1339.57 ; U14.4@3628.94,1305.32 3649.68,1305.32 3655,1300
  1-SIG-TOP w10: v1(615,2455) C47.1@615,2480.32 ; v1(1015,2455) C46.1@1015,2480.32 ; U15.1@1251.57,1391 1269,1391 1275,1385 v1(1275,1370) ; v1(1526,306) 1565.35,345.35 L5.4@1565.35,346.46 ; v1(1526.81,385) L5.4@1565.35,346.46 ; v1(1610,380) 1598.9,380 L5.4@1565.35,346.46 ; 2581.93,433.07 TFT.23@2655.51,433.07 ; 2655.51,355.51 TFT.23@2655.51,433.07 ; 2655.51,514.49 TFT.23@2655.51,433.07 ; v1(3080,550) 3080,553.58 3080.71,554.29 TFT.5@3080.71,511.81 3080.71,479.29 3081.42,480 v1(3085,480) ; 3250,360 TFT.24@3250,433.07 ; 3250,515 TFT.24@3250,433.07 ; 3318.07,433.07 TFT.24@3250,433.07 ; v1(3580,1495) 3595.43,1510.43 C59.1@3625,1510.43
  6-GND-BOT w6: C75.1@255,1265.32 265.31,1265.32 270,1270 v1(275,1270) 280,1270 284.69,1265.32 C78.1@295,1265.32 ; v1(295,2390) C43.1@320.31,2390 ; U22.3@379.69,1358.5 379.69,1330.32 v1(390,1320) ; U23.13@584.06,650 v1(615,650) 629.69,650 C95.1@635,655.32 ; v1(1950,735) X10.5@1950,775 ; v1(1950,960) X1.5@1950,1000 ; v1(1950,1185) X9.5@1950,1225 ; v1(1950,2310) X2.5@1950,2350 ; v1(2050,2085) X8.3@2050,2125 ; v1(3180,575) C72.1@3205.32,575 ; v1(3745,710) v1(3835,710)
  6-GND-BOT w8: R138.1@930,194.68 v1(930,220) ; v1(1560,1785) C107.1@1585.31,1785 ; C106.1@1585.31,1865 1585.31,1880.32 v1(1595,1890) ; C105.1@1704.69,1785 1714.69,1795 v1(1730,1795) ; C104.1@1704.69,1865 v1(1720,1865) ; v1(1775,2090) D17.2@1775,2113.78 ; v1(2445.82,1660.82) 2450.82,1660.82 2469.68,1679.68 C70.2@2475,1679.68 ; OLED.1@2809.84,978.35 2873.35,978.35 v1(2875,980) ; OLED.8@2809.84,1171.26 2873.74,1171.26 v1(2875,1170) ; OLED.10@2809.84,1226.38 2871.38,1226.38 v1(2875,1230) ; OLED.12@2809.84,1281.5 2873.5,1281.5 2876.16,1284.15 v1(2876.16,1284.32) ; OLED.16@2809.84,1391.73 2861.73,1391.73 v1(2875,1405) 2860.71,1419.29 OLED.17@2809.84,1419.29 ; OLED.20@2809.84,1501.97 2861.97,1501.97 v1(2875,1515) 2860.47,1529.53 OLED.21@2809.84,1529.53 ; OLED.22@2809.84,1557.09 2867.91,1557.09 v1(2875,1550) 2875,1570 2860.35,1584.65 OLED.23@2809.84,1584.65 ; OLED.24@2809.84,1612.2 2852.2,1612.2 v1(2875,1635) 2870.24,1639.76 OLED.25@2809.84,1639.76
  6-GND-BOT w10: C53.1@1890,445.32 1930,445.32 R84.1@1930.31,445 ; v1(1910,265) C54.2@1948.98,265 C54.2@1950,266.02 ; v1(1950,220) C54.2@1950,266.02 ; v1(1950,310) C54.2@1950,266.02 ; v1(2065,340) 2065.16,340.16 U13.7@2065.16,370.47 ; v1(2150,305) 2163.46,291.54 C55.2@2163.46,275 2165,273.46 v1(2165,240)
  6-GND-BOT w15: v1(300,1585) 317.91,1602.91 ESP32_MOD.38@317.91,1640.35 317.91,1692.91 v1(320,1695)
  other v1: 250,44.49 325,44.49 400,44.49 475,44.49 550,44.49 625,44.49 700,44.49 775,44.49 850,44.49 925,44.49 1000,44.49 1075,44.49 1150,44.49 1225,44.49 1300,44.49 1375,44.49 1450,44.49 1525,44.49 1600,44.49 1675,44.49 1750,44.49 1825,44.49 1900,44.49 1975,44.49 2050,44.49 2125,44.49 2200,44.49 3700,44.49 118.11,55.12 3818.9,55.12 73.57,73.57 162.65,73.57 3774.36,73.57 3863.44,73.57 55.12,118.11 181.1,118.11 3755.91,118.11 3881.89,118.11 212.5,119.49 512.5,119.49 587.5,119.49 662.5,119.49 737.5,119.49 812.5,119.49 2237.5,119.49 3662.5,119.49 73.57,162.65 162.65,162.65 3774.36,162.65 3863.44,162.65 118.11,181.1 3818.9,181.1 1450,194.49 1900,194.49 903,195 2987.5,269.49 3062.5,269.49 3137.5,269.49 3212.5,269.49 3287.5,269.49 3362.5,269.49 3437.5,269.49 3512.5,269.49 3587.5,269.49 3812.5,269.49 3887.5,269.49 1600,300 1705,300 3895,300 1352,335 175,344.49 1750,344.49 2425,344.49 2500,344.49 2575,344.49 2650,344.49 2725,344.49 2800,344.49 2875,344.49 2950,344.49 3025,344.49 3100,344.49 3175,344.49 3250,344.49 3325,344.49 3400,344.49 3475,344.49 3550,344.49 3625,344.49 3700,344.49 3775,344.49 1526,345 3855,345 1395,375 3895,390 812.5,419.49 1112.5,419.49 1262.5,419.49 1712.5,419.49 2462.5,419.49 2537.5,419.49 2762.5,419.49 2837.5,419.49 2912.5,419.49 2987.5,419.49 3062.5,419.49 3137.5,419.49 3362.5,419.49 3437.5,419.49 3512.5,419.49 3587.5,419.49 3662.5,419.49 3737.5,419.49 3812.5,419.49 3887.5,419.49 3335,440 830,450 920,450 980,450 1080,450 3370,475 100,494.49 1525,494.49 2575,494.49 3400,494.49 3475,494.49 3550,494.49 3625,494.49 3700,494.49 3850,494.49 525,560 555,560 2912.5,569.49 2987.5,569.49 3437.5,569.49 3512.5,569.49 3587.5,569.49 3662.5,569.49 3887.5,569.49 2250,585 1900,590 370,633 1810,640 1990,640 2160,640 2340,640 2950,644.49 3025,644.49 3850,644.49 715,655 345,660 370,686 215,700 280,700 115,705 345,705 737.5,719.49 3887.5,719.49 525,740 75,750 710,750 3335,790 925,794.49 1675,794.49 2275,794.49 2725,794.49 2800,794.49 2950,794.49 3025,794.49 3100,794.49 3175,794.49 3475,794.49 3550,794.49 3625,794.49 3700,794.49 3850,794.49 115,795 450,795 620,800 3895,810 3510,820 145,845 3295,850 3855,850 587.5,869.49 887.5,869.49 3662.5,869.49 3737.5,869.49 3812.5,869.49 115,875 3895,900 145,910 280,920 540,926 1275,935 100,944.49 2275,944.49 2350,944.49 2725,944.49 2800,944.49 2950,944.49 3100,944.49 280,945 350,950 329,967 3685,995 752,1012 1337.5,1019.49 2312.5,1019.49 2462.5,1019.49 2687.5,1019.49 3212.5,1019.49 3812.5,1019.49 3887.5,1019.49 3685,1065 350,1070 330,1080 3415,1085 100,1094.49 925,1094.49 1150,1094.49 2275,1094.49 2350,1094.49 2425,1094.49 3475,1094.49 390,1100 565,1105 330,1120 3455,1120 475,1165 3410,1165 137.5,1169.49 287.5,1169.49 362.5,1169.49 1187.5,1169.49 1562.5,1169.49 1787.5,1169.49 2312.5,1169.49 2387.5,1169.49 2462.5,1169.49 2612.5,1169.49 2687.5,1169.49 3887.5,1169.49 3385,1235 100,1244.49 325,1244.49 1150,1244.49 1375,1244.49 1450,1244.49 1525,1244.49 1675,1244.49 3175,1244.49 3240,1245 1190,1250 1225,1250 1265,1250 3280,1275 3630,1285 1412.5,1319.49 1487.5,1319.49 1562.5,1319.49 3212.5,1319.49 3287.5,1319.49 3887.5,1319.49 100,1394.49 325,1394.49 2350,1394.49 2425,1394.49 2575,1394.49 662.5,1469.49 3887.5,1469.49 3440,1495 3665,1510 3750,1510 3835,1510 3475,1525 3335,1535 550,1544.49 625,1544.49 700,1544.49 1075,1544.49 1150,1544.49 1450,1544.49 1600,1544.49 1675,1544.49 1750,1544.49 2575,1544.49 3850,1544.49 3625,1550 3710,1550 3790,1550 50,1585 75,1585 100,1585 125,1585 235,1585 275,1585 290,1600 3062.5,1619.49 3587.5,1619.49 3812.5,1619.49 3887.5,1619.49 290,1625 3545,1625 3655,1640 3745,1640 290,1650 3570,1650 3335,1655 290,1675 3545,1675 3040,1690 3110,1690 3175,1690 3625,1694.49 3775,1694.49 3850,1694.49 290,1700 3570,1700 3700,1705 290,1725 3010,1725 3140,1725 3545,1725 290,1750 3570,1750 3100,1760 1112.5,1769.49 3587.5,1769.49 3812.5,1769.49 3887.5,1769.49 290,1775 3545,1775 3010,1790 3075,1790 290,1800 290,1825 2850,1825 2975,1825 3040,1825 3105,1825 325,1844.49 1825,1844.49 3475,1844.49 3550,1844.49 3850,1844.49 290,1850 290,1875 2850,1890 290,1900 362.5,1919.49 1937.5,1919.49 2012.5,1919.49 3512.5,1919.49 3587.5,1919.49 3812.5,1919.49 3887.5,1919.49 290,1925 290,1950 2850,1955 290,1975 325,1994.49 400,1994.49 925,1994.49 1075,1994.49 1150,1994.49 1525,1994.49 1600,1994.49 2800,1994.49 2950,1994.49 3475,1994.49 3550,1994.49 3850,1994.49 290,2000 290,2025 290,2050 362.5,2069.49 812.5,2069.49 2312.5,2069.49 3362.5,2069.49 3512.5,2069.49 3812.5,2069.49 290,2075 3700,2090 290,2100 290,2125 2425,2144.49 2800,2144.49 2950,2144.49 3775,2144.49 290,2150 3655,2160 290,2175 290,2200 2387.5,2219.49 2537.5,2219.49 3062.5,2219.49 290,2225 3220,2240 3695,2240 290,2250 2940,2250 3010,2250 3075,2250 3130,2260 290,2275 3600,2285 3850,2294.49 290,2300 290,2325 2940,2325 3010,2325 3075,2325 3140,2325 3210,2325 290,2350 3380,2355 3470,2360 50,2365 75,2365 100,2365 125,2365 150,2365 175,2365 200,2365 225,2365 250,2365 275,2365 437.5,2369.49 2162.5,2369.49 2237.5,2369.49 2312.5,2369.49 3212.5,2369.49 3287.5,2369.49 3395,2380 3490,2385 3600,2385 3395,2410 2885,2420 3140,2420 3185,2420 3360,2420 2840,2425 3464.55,2434.6 3395,2440 175,2444.49 250,2444.49 325,2444.49 400,2444.49 850,2444.49 925,2444.49 2125,2444.49 2200,2444.49 2650,2444.49 2725,2444.49 3434.42,2444.4 3395,2470 3434.42,2476.08 2615,2485 2725,2495 2840,2495 3140,2495 3185,2495 3610,2495 3640,2495 2778.21,2496.12 2809.79,2498.74 3395,2500 2886.94,2501.07 2650,2505 2700,2505 3447.04,2505.14 3478.6,2507.96 2570,2510 212.5,2519.49 1937.5,2519.49 2012.5,2519.49 2987.5,2519.49 3062.5,2519.49 3737.5,2519.49 3812.5,2519.49 3887.5,2519.49 2870.35,2528.07 3486.9,2538.54 2570,2540 3515,2540 3545,2540 3665,2540 2650,2545 2700,2545 2800,2545 2850,2545 3580,2550 1310,2555 2725,2555 2615,2565 2645,2570 2705,2570 2795,2570 2855,2570 3210,2570 3260,2570 3310,2570 3665,2570 118.11,2574.8 3818.9,2574.8 3635,2575 3600,2590 73.57,2593.25 162.65,2593.25 3774.36,2593.25 3863.44,2593.25 250,2594.49 400,2594.49 475,2594.49 550,2594.49 775,2594.49 850,2594.49 925,2594.49 1150,2594.49 3700,2594.49 3235,2595 3285,2595 3335,2595 3400,2595 3440,2595 3480,2595 3520,2595 3560,2595 495,2620 755,2620 895,2620 1155,2620 55.12,2637.8 181.1,2637.8 3755.91,2637.8 3881.89,2637.8 705,2665 212.5,2669.49 287.5,2669.49 362.5,2669.49 662.5,2669.49 3212.5,2669.49 3287.5,2669.49 3362.5,2669.49 3437.5,2669.49 3512.5,2669.49 3587.5,2669.49 3662.5,2669.49 73.57,2682.34 162.65,2682.34 3774.36,2682.34 3863.44,2682.34 118.11,2700.79 3818.9,2700.79 495,2710 755,2710 895,2710 1155,2710
  other v2: 2055.31,405.32 2094.69,405.32 2075,425 2055.31,444.68 2094.69,444.68 505.31,630.32 544.69,630.32 525,650 505.31,669.68 544.69,669.68 1480.31,980.32 1519.69,980.32 1500,1000 1480.31,1019.68 1519.69,1019.68 360,1410.63 320.63,1450 360,1450 399.37,1450 360,1489.37 2380.32,2330.32 2419.68,2330.32 2400,2350 2380.32,2369.68 2419.68,2369.68 2000,2559.26 2000,2590.75
  other v3: 314.57,339.57 350,339.57 385.43,339.57 314.57,375 350,375 385.43,375 314.57,410.43 350,410.43 385.43,410.43 2450,741.54 2416.54,775 2450,775 2483.46,775 2450,808.46 950,1216.54 916.54,1250 950,1250 983.46,1250 950,1283.46 2325,1741.54 2291.54,1775 2325,1775 2358.46,1775 2325,1808.46 725,1830.32 725,1869.68
  other v4: 1400,2472.44 1360.63,2500 1439.37,2500 1400,2527.56
GPIO0: ESP32_MOD.25 Q11.3 | length 1088.6
  1-SIG-TOP w6: Q11.3@364.57,2024.99 v1(395,2025)
  4-SIG-HOR w6: v1(395,2025) v1(950,2025)
  5-SIG-VERT w6: v1(950,2025) 950,1595 955.48,1595 955,1594.52 v1(955,1590)
  6-GND-BOT w6: v1(955,1590) 955,1611 963.22,1619.22 955,1627.44 ESP32_MOD.25@967.91,1640.35
GPIO1: ESP32_MOD.35 R103.4 U22.25 | length 513.2
  1-SIG-TOP w6: v1(465,1755) 465.16,1755.16 R103.4@465.16,1792.5
  5-SIG-VERT w6: v1(465,1755) 465,1754.48 469.16,1758.63 469.16,1503.63 464.16,1498.63 464.16,1481.37 484.34,1461.19 v1(484.34,1449.34)
  6-GND-BOT w6: U22.25@451.5,1450 452.16,1449.34 452.82,1450 453.49,1449.34 v1(484.34,1449.34) ; v1(465,1755) 465,1725 467.91,1722.09 ESP32_MOD.35@467.91,1640.35
GPIO2: ESP32_MOD.24 R16.2 U26.11 U31.17 | length 1720.5
  1-SIG-TOP w6: R16.2@1034.69,1740 1055,1740 v1(1060,1735) ; U31.17@1429.53,2432.09 1429.53,2418.5 1440,2408.03 v1(1440,2400.91) ; v1(1910,1750) 1910.79,1749.21 U26.11@1951.38,1749.21
  4-SIG-HOR w6: v1(1060,1735) 1060.84,1735.84 1253.87,1735.84 1263.03,1745 1382.49,1745 1392.49,1735 v1(1405,1735) 1457.66,1735 1458.46,1734.2 1471.54,1734.2 1472.34,1735 1525.52,1735 1529.35,1738.83 1547.8,1738.83 1553.58,1733.05 1771.6,1733.05 1785.55,1747 1907,1747 v1(1910,1750)
  5-SIG-VERT w6: v1(1405,1735) 1405,1755 1448,1798 1448,2382 1440,2390 v1(1440,2400.91)
  6-GND-BOT w6: ESP32_MOD.24@1007.28,1750 1022.28,1735 v1(1060,1735)
GPIO3: ESP32_MOD.34 R108.2 U22.26 | length 388.4
  1-SIG-TOP w6: R108.2@459.69,1430 501.32,1430 511.32,1420 v1(515,1420)
  5-SIG-VERT w6: v1(515,1420) 515,1430 545.84,1460.84 545.84,1478.63 537,1487.48 537,1501.42 517.16,1521.26 517.16,1572.16 v1(530,1585)
  6-GND-BOT w6: U22.26@451.5,1430.32 501.01,1430.32 511.32,1420 v1(515,1420) ; ESP32_MOD.34@517.91,1640.35 517.91,1587.09 520,1585 v1(530,1585)
GPIO4: ESP32_MOD.26 R5.1 R64.1 TP1.1 U26.40 U31.18 | length 1533.7
  1-SIG-TOP w6: TP1.1@925,1745 930,1740 v1(930,1700) R64.1@955.31,1700 ; v1(1430,1700) 1439.84,1709.84 U26.40@1498.62,1709.84 ; U31.18@1449.21,2432.09 1449.21,2418.34 1465.82,2401.73 v1(1465.82,2399.18) 1475,2390 R5.1@1475,2344.68
  4-SIG-HOR w6: v1(930,1700) 940.8,1689.2 1419.2,1689.2 v1(1430,1700)
  5-SIG-VERT w6: v1(1430,1700) 1430,1761.97 1460,1791.97 1460,2393.35 v1(1465.82,2399.18)
  6-GND-BOT w6: ESP32_MOD.26@917.91,1640.35 917.91,1692.91 925,1700 v1(930,1700)
GPIO5: ESP32_MOD.29 R156.2 U28.22 U31.4 | length 5303.9
  1-SIG-TOP w6: U31.4@1429.53,2567.91 1429.53,2576.52 1441.73,2588.72 1480,2626.97 R156.2@1480,2630.32 1489.69,2640 1505,2640 1525,2660 v1(1525,2665) ; U28.22@2524.8,784.84 2534.38,784.84 2539.54,790 2640,790 v1(2646.16,783.84)
  4-SIG-HOR w6: v1(810,2675) 1197.66,2675 1198.46,2675.8 1211.54,2675.8 1222.34,2665 v1(1525,2665) 1647.66,2665 1648.46,2664.2 1661.54,2664.2 1662.34,2665 1777.66,2665 1778.46,2665.8 1791.54,2665.8 1792.34,2665 1942.66,2665 1953.46,2654.2 1966.54,2654.2 1982.34,2670 2119.99,2670 2135.79,2654.2 2216.87,2654.2 2218.46,2655.8 2231.54,2655.8 2233.13,2654.2 2431.54,2654.2 2432.34,2655 2517.66,2655 2518.46,2654.2 2531.54,2654.2 2532.34,2655 2617.66,2655 2618.46,2654.2 2672.88,2654.2 v1(2701.05,2682.38)
  5-SIG-VERT w6: v1(800,1715) 800,1727.51 805,1732.51 805,1852.66 825.8,1873.46 825.8,1886.54 802,1910.34 802,1945.37 808.83,1952.2 808.83,1971.17 781,1999 781,2228.49 788.94,2236.43 788.94,2273.57 781,2281.51 781,2361 810,2390 v1(810,2675) ; v1(2646.16,783.84) 2646.16,798.82 2650.8,803.46 2650.8,816.54 2646.16,821.18 2646.16,1038.84 2631.65,1053.35 2631.65,1076.13 2650,1094.49 2650,1660 2673.08,1683.08 2673.08,1701.49 2672,1702.57 2672,1885.55 2677.84,1891.4 2677.84,1918.37 2680.84,1921.37 2680.84,1938.63 2660,1959.48 2660,2105 2680,2125 2680,2350 2745,2415 2745,2570.52 2739.16,2576.37 2739.16,2593.63 2745,2599.48 2745,2620 2705,2660 2705,2674.75 2697.38,2682.38 v1(2701.05,2682.38)
  6-GND-BOT w6: ESP32_MOD.29@767.91,1640.35 767.91,1682.91 v1(800,1715)
GPIO6: ESP32_MOD.20
GPIO7: ESP32_MOD.21
GPIO8: ESP32_MOD.22
GPIO9: ESP32_MOD.17
GPIO10: ESP32_MOD.18
GPIO11: ESP32_MOD.19
GPIO12: ESP32_MOD.14 R94.2 | length 71.9
  1-SIG-TOP w6: R94.2@965,2339.68 v1(965,2360)
  6-GND-BOT w6: v1(965,2360) 965,2312.56 ESP32_MOD.14@967.91,2309.65
GPIO13: ESP32_MOD.16 R92.2 | length 25.3
  1-SIG-TOP w6: v1(1055,2150) R92.2@1080.31,2150
GPIO14: ESP32_MOD.13 R91.2 | length 71.5
  1-SIG-TOP w6: R91.2@920,2339.68 v1(920,2360)
  6-GND-BOT w6: ESP32_MOD.13@917.91,2309.65 920,2311.73 v1(920,2360)
GPIO15: ESP32_MOD.23 R93.2 | length 25.3
  1-SIG-TOP w6: v1(1055,1800) R93.2@1080.31,1800
GPIO16: ESP32_MOD.27 R10.2 R70.1 U26.52 | length 1109.4
  1-SIG-TOP w6: R70.1@870,1630.32 869.69,1630 R10.2@869.69,1590 880,1579.68 v1(880,1565) ; U26.52@1636.42,1473.62 1636.42,1436.42 v1(1637.83,1435)
  4-SIG-HOR w6: v1(875,1425) 1033.55,1425 1036.4,1422.16 1070.19,1422.16 1080.19,1432.16 1459.62,1432.16 1462.29,1434.83 1507.71,1434.83 1510.38,1432.16 1552.85,1432.16 1563.49,1442.8 1630.04,1442.8 v1(1637.83,1435)
  5-SIG-VERT w6: v1(875,1425) 880,1430 v1(880,1565)
  6-GND-BOT w6: ESP32_MOD.27@867.91,1640.35 880,1628.27 v1(880,1565)
GPIO17: ESP32_MOD.28 R11.2 R71.1 U26.33 | length 1013.1
  1-SIG-TOP w6: v1(855,1830) 855,1840.32 850.31,1845 R11.2@855.31,1850 855.31,1890 R71.1@855,1890.32 ; U26.33@1498.62,1847.64 1532.64,1847.64 1530.28,1850 v1(1530,1850)
  4-SIG-HOR w6: v1(855,1830) 1028.72,1830 1038.52,1839.8 1071.48,1839.8 1082.28,1829 1101.66,1829 1113.46,1840.8 1126.54,1840.8 1137.34,1830 1372.66,1830 1378.46,1824.2 1405.61,1824.2 1421.4,1840 1520,1840 v1(1530,1850)
  5-SIG-VERT w6: v1(840,1695) 840,1696.98 855,1711.98 v1(855,1830)
  6-GND-BOT w6: ESP32_MOD.28@817.91,1640.35 825,1647.44 825,1670 840,1685 v1(840,1695)
GPIO18: ESP32_MOD.30 R6.1 R65.1 TP2.1 U26.41 U31.19 | length 1789.3
  1-SIG-TOP w6: R65.1@714.69,1735 714.69,1700.32 v1(715,1700) 715,1675 TP2.1@720,1670 ; v1(1457.08,1682.08) 1465.16,1690.16 U26.41@1498.62,1690.16 ; U31.19@1468.9,2432.09 1468.9,2421.59 1472.47,2418.02 1473.63,2418.02 1495,2396.65 v1(1495,2395) 1495,2364.68 R6.1@1515,2344.68
  4-SIG-HOR w6: v1(715,1700) 715.8,1699.2 811.23,1699.2 830.37,1718.34 882.18,1718.34 923.32,1677.2 1452.2,1677.2 v1(1457.08,1682.08)
  5-SIG-VERT w6: v1(1457.08,1682.08) 1457.08,1702.92 1450.84,1709.16 1450.84,1734.68 1444.16,1741.37 1444.16,1759.16 1472,1787 1472,2362.49 1495,2385.49 v1(1495,2395)
  6-GND-BOT w6: v1(715,1700) 715.83,1700 717.91,1697.91 ESP32_MOD.30@717.91,1640.35
GPIO19: ESP32_MOD.31
GPIO21: ESP32_MOD.33 R66.1 U34.6 | length 345.6
  1-SIG-TOP w6: R66.1@595.31,1735 605,1725.32 v1(605,1700) ; v1(600,1860) 600.16,1859.84 U34.6@665.96,1859.84
  5-SIG-VERT w6: v1(600,1860) 604.16,1855.84 604.16,1779.26 604.84,1778.57 604.84,1741.43 604.16,1740.74 604.16,1700.84 v1(605,1700)
  6-GND-BOT w6: ESP32_MOD.33@567.91,1640.35 567.91,1667.91 600,1700 v1(605,1700)
GPIO22: ESP32_MOD.36
GPIO23: ESP32_MOD.37 R67.1 U34.5 | length 584.2
  1-SIG-TOP w6: R67.1@350,1730.32 350,1710 v1(360,1700) ; v1(635,1880) 635.47,1879.53 U34.5@665.96,1879.53
  4-SIG-HOR w6: v1(360,1880) v1(635,1880)
  5-SIG-VERT w6: v1(360,1700) 360,1762.66 359.2,1763.46 359.2,1776.54 360,1777.34 v1(360,1880)
  6-GND-BOT w6: v1(360,1700) 360,1648.27 ESP32_MOD.37@367.91,1640.35
GPIO27: ESP32_MOD.12 R68.2 R70.2 U16.10 | length 4431.7
  1-SIG-TOP w6: R70.2@870,1669.68 890.31,1690 v1(890.31,1734.68) ; R68.2@3105,1044.68 3095,1054.68 v1(3095,1070) 3105,1070 3117.13,1082.13 U16.10@3117.13,1143.5
  4-SIG-HOR w6: v1(870,2255) 897,2282 985.55,2282 996.4,2292.84 1023.6,2292.84 1039.93,2276.51 1489.17,2276.51 1508.46,2295.8 1521.54,2295.8 1522.1,2295.24 1578.36,2295.24 1585.77,2287.83 1607.74,2287.83 1619.57,2276 1713.64,2276 1727.47,2289.83 1787.71,2289.83 1790.54,2287 1795.03,2287 1820.87,2312.84 1852.16,2312.84 1862.34,2302.66 1915.94,2302.66 1929.6,2289 2349,2289 2357.84,2297.84 2427.84,2297.84 2450,2320 2495,2320 2518,2297 2737.69,2297 2743.49,2302.8 2766.51,2302.8 2772.31,2297 2990.37,2297 3002.2,2308.83 3017.8,2308.83 3036.63,2290 v1(3140,2290)
  5-SIG-VERT w6: v1(870,2255) 880.73,2244.27 880.73,2229.59 891.69,2218.63 891.69,2201.37 882.84,2192.52 882.84,1885.18 878.89,1881.23 878.89,1866.11 887.84,1857.16 887.84,1816.4 880.73,1809.29 880.73,1744.27 v1(890.31,1734.68) ; v1(3095,1070) 3095,1071.97 3116,1092.97 3116,1242.37 3112,1246.37 3112,1263.63 3125.8,1277.43 3125.8,1699.2 3112.2,1712.8 3112.2,1742.47 3120.8,1751.06 3120.8,1949.9 3117.2,1953.49 3117.2,1976.51 3118.95,1978.26 3118.95,2070.4 3125.16,2076.6 3125.16,2136.93 3149,2160.77 3149,2281 v1(3140,2290)
  6-GND-BOT w6: ESP32_MOD.12@867.91,2309.65 867.91,2257.09 v1(870,2255)
GPIO32: ESP32_MOD.8 R69.2 R71.2 U16.11 | length 4852.9
  1-SIG-TOP w6: v1(850,1975) 855,1970 R71.2@855,1929.68 ; U16.11@3132.87,1143.5 3132.87,1087.13 3145,1075 v1(3140,1070) 3140,1049.68 R69.2@3145,1044.68
  4-SIG-HOR w6: v1(670,2255) 685.84,2239.16 818.63,2239.16 830.84,2251.37 830.84,2263.87 872.97,2306 975.61,2306 986.46,2316.84 1033.54,2316.84 1049.88,2300.51 1479.23,2300.51 1498.52,2319.8 1531.48,2319.8 1532.04,2319.24 1588.3,2319.24 1595.71,2311.83 1617.68,2311.83 1629.51,2300 1703.7,2300 1717.53,2313.83 1778.83,2313.83 1833.83,2368.83 2048.09,2368.83 2086.6,2407.34 2113.4,2407.34 2132.31,2388.43 2427.45,2388.43 2440.88,2375 2652.66,2375 2668.46,2359.2 2681.54,2359.2 2692.34,2370 2762.66,2370 2768.46,2364.2 2781.54,2364.2 2783.18,2365.84 2852.71,2365.84 2861.4,2357.16 2888.6,2357.16 2897.29,2365.84 2995.32,2365.84 3009.48,2380 3145,2380 v1(3150,2375) ; v1(670,2355) 802.66,2355 808.46,2349.2 821.54,2349.2 837.34,2365 v1(865,2365)
  5-SIG-VERT w6: v1(850,1975) 858.84,1983.84 858.84,2171.16 849.16,2180.84 849.16,2264.16 865,2280 v1(865,2365) ; v1(3140,1070) 3140,1232.68 3153.68,1246.37 3153.68,1266.32 3137.8,1282.2 3137.8,1704.18 3124.2,1717.77 3124.2,1737.5 3132.8,1746.09 3132.8,1954.87 3129.2,1958.46 3129.2,1971.54 3130.95,1973.29 3130.95,2065.43 3137.16,2071.63 3137.16,2131.96 3161,2155.8 3161,2364 v1(3150,2375)
  6-GND-BOT w6: v1(670,2255) 667.91,2257.09 ESP32_MOD.8@667.91,2309.65 667.91,2357.91 670,2355.83 v1(670,2355)
GPIO33: ESP32_MOD.9 R73.1 U26.35 | length 1439.6
  1-SIG-TOP w6: v1(715,2260) 715,2259.68 719.69,2255 R73.1@719.69,2225 ; U26.35@1498.62,1808.27 1533.27,1808.27 v1(1535,1810)
  4-SIG-HOR w6: v1(735,1800) 750,1815 843.37,1815 847.2,1811.17 862.8,1811.17 868.63,1817 1032.69,1817 1043.49,1827.8 1066.51,1827.8 1077.31,1817 1105.66,1817 1113.46,1809.2 1126.54,1809.2 1134.34,1817 1368.69,1817 1373.49,1812.2 1410.58,1812.2 1422.2,1823.83 1437.8,1823.83 1451.63,1810 v1(1535,1810)
  5-SIG-VERT w6: v1(715,2260) 723.25,2251.75 723.25,2246.37 733,2236.62 733,1888.2 745,1876.2 745,1810 v1(735,1800)
  6-GND-BOT w6: v1(715,2260) 717.91,2262.91 ESP32_MOD.9@717.91,2309.65
GPIO35: ESP32_MOD.7 R72.1 U26.36 | length 1651.2
  1-SIG-TOP w6: v1(620,2360) 643.84,2336.16 677.8,2336.16 691.65,2350 R72.1@705.31,2350 ; v1(1430,1805) 1435,1805 1451.42,1788.58 U26.36@1498.62,1788.58
  4-SIG-HOR w6: v1(625,1805) 634.18,1795.82 646.84,1795.82 658.46,1784.2 671.54,1784.2 683.16,1795.82 712.55,1795.82 727.2,1781.17 742.8,1781.17 764.63,1803 838.4,1803 842.23,1799.17 867.77,1799.17 873.6,1805 1037.66,1805 1048.46,1815.8 1061.54,1815.8 1072.34,1805 1100.69,1805 1108.49,1797.2 1131.51,1797.2 1139.31,1805 1363.72,1805 1368.52,1800.2 1425.2,1800.2 v1(1430,1805)
  5-SIG-VERT w6: v1(620,2360) v1(620,2360) 620.05,2197.39 614.2,2191.54 614.2,2178.46 625,2167.66 625,1892.34 619.2,1886.54 619.2,1873.46 625,1867.66 v1(625,1805)
  6-GND-BOT w6: ESP32_MOD.7@617.91,2309.65 617.91,2357.91 v1(620,2360)
GPIO.GPIO5: U20.4 U26.55 | length 2312.8
  1-SIG-TOP w6: U26.55@1695.47,1473.62 1695.47,1439.53 v1(1705,1430)
  4-SIG-HOR w6: v1(1722.84,668.84) 1733.53,658.16 2343.54,658.16 2351.23,665.84 3134.16,665.84 v1(3145,655)
  5-SIG-VERT w6: v1(1705,1430) 1705,1416.97 1715,1406.97 1715,756.45 1722.84,748.6 v1(1722.84,668.84)
  6-GND-BOT w6: v1(3145,655) 3176.65,655 3188.77,667.13 U20.4@3202.36,667.13
I2C0.SCL: R155.1 TP3.1 U1.5 U2.7 U28.19 U29.19 U30.19 U31.6 U38.6 U41.12 | length 8296.6
  1-SIG-TOP w6: v1(225,330) 240.47,345.47 U1.5@273.23,345.47 ; U30.19@999.21,1324.8 1019.8,1324.8 v1(1020,1325) ; U31.6@1390.16,2567.91 1390.16,2600.16 v1(1400,2610) R155.1@1400,2630.32 ; v1(2250,1845) 2250,1824.41 U29.19@2250.2,1824.21 ; v1(2390,2265) 2390.16,2265.16 U38.6@2390.16,2290.94 U38.6@2390.16,2293.9 ; v1(2495,1080) 2512.76,1080 2517.76,1075 U41.12@2517.91,1075.16 ; TP3.1@2510,545 2525,560 v1(2525,575) 2525,580 2535,590 2535,720 2529.21,725.79 U28.19@2524.8,725.79
  4-SIG-HOR w6: v1(225,575) 426.4,575 432.23,569.17 457.77,569.17 481.6,593 652.69,593 658.49,587.2 681.51,587.2 687.31,593 770.37,593 792.2,571.17 807.8,571.17 812.47,575.84 912.53,575.84 917.2,571.17 932.8,571.17 935.78,574.16 1029.22,574.16 1032.2,571.17 1047.8,571.17 1052.47,575.84 1139.43,575.84 1144.38,580.8 1161.54,580.8 1168.13,574.2 1576.32,574.2 1591.37,559.16 1609.16,559.16 1620.84,570.84 1659.16,570.84 v1(1660,570) 1660.84,569.16 2197.81,569.16 2208.97,558 2389.58,558 2401.43,569.84 2438.57,569.84 2442.26,566.16 2516.16,566.16 v1(2525,575) ; v1(1010,2260) 1017.49,2252.51 1503.18,2252.51 1503.49,2252.2 1526.51,2252.2 1526.82,2252.51 1553.69,2252.51 v1(1565.59,2264.41) 1565.59,2265.59 1570.01,2261.17 1579.55,2261.17 1582.2,2263.83 1597.8,2263.83 1609.63,2252 1723.58,2252 1730.58,2259 1745.4,2259 1752.23,2265.83 1777.77,2265.83 1782.42,2261.17 1885.8,2261.17 1900.8,2246.17 1921.17,2246.17 1940,2265 v1(2390,2265) 2395,2260 2475,2260 v1(2480,2255) ; v1(1400,2610) 1430,2640 v1(1550,2640) ; v1(2250,1845) 2255,1850 2388.37,1850 2397.2,1841.17 2412.8,1841.17 2425.47,1853.84 2486.16,1853.84 v1(2495,1845)
  5-SIG-VERT w6: v1(225,330) 228.83,333.83 228.83,377.58 214.17,392.23 214.17,564.17 v1(225,575) ; v1(1010,2260) 1002,2252 1002,1369.93 1020,1351.93 v1(1020,1325) ; v1(1550,2640) 1560.84,2629.16 1560.84,2537.12 1550.2,2526.48 1550.2,2284.56 1565.59,2269.17 v1(1565.59,2264.41) ; v1(1655,375) 1662.2,382.2 1662.2,567.8 v1(1660,570) ; v1(2480,2255) 2484.12,2250.88 2484.12,1917.48 2475.28,1908.63 2475.28,1877.75 2495,1858.03 v1(2495,1845) 2518,1822 2518,1103 v1(2495,1080) 2495,1075 2515.84,1054.16 2515.84,875 2509.2,868.36 2509.2,842.77 2525,826.97 2525,637.34 2530.8,631.54 2530.8,618.46 2525,612.66 v1(2525,575)
  6-GND-BOT w6: v1(1655,375) 1659.84,370.16 U2.7@1659.84,324.02
I2C0.SDA: R154.1 TP4.1 U1.6 U2.6 U28.20 U29.20 U30.20 U31.5 U38.7 U41.2 | length 8480.5
  1-SIG-TOP w6: v1(240,305) 240,315 250.79,325.79 U1.6@273.23,325.79 ; U30.20@979.53,1324.8 979.53,1341.98 v1(990,1352.46) ; U31.5@1409.84,2567.91 1409.84,2579.84 1435,2605 v1(1435,2610) 1440,2615 R154.1@1440,2630.32 ; v1(2225,1860) 2225,1815 2235.47,1804.53 U29.20@2250.2,1804.53 ; U38.7@2409.84,2293.9 U38.7@2409.84,2290.94 2409.84,2235.16 2410,2235.31 v1(2410,2240) ; U28.20@2524.8,745.47 2539.53,745.47 2555,730 v1(2555,555) 2560,555 2565,560 TP4.1@2575,550 ; v1(2540,1030) 2540,1052.76 U41.2@2540.16,1052.91
  1-SIG-TOP w8: U1.6@273.23,325.79 U1.6@273.82,325.79
  4-SIG-HOR w6: v1(245,555) 253,563 421.43,563 427.26,557.17 462.74,557.17 486.57,581 647.72,581 653.52,575.2 686.48,575.2 692.28,581 765.4,581 787.23,559.17 812.77,559.17 817.44,563.84 907.56,563.84 912.23,559.17 937.77,559.17 940.75,562.16 1024.25,562.16 1027.23,559.17 1052.77,559.17 1057.44,563.84 1133.82,563.84 1148.46,549.2 1164.2,549.2 1177.2,562.2 1571.35,562.2 1586.4,547.16 1632.16,547.16 v1(1635,550) 1650.52,550 1651.37,549.16 1668.63,549.16 1676.63,557.16 2192.84,557.16 2204,546 2394.55,546 2406.4,557.84 2433.6,557.84 2437.29,554.16 2554.16,554.16 v1(2555,555) ; v1(975,2235) 989.08,2220.92 1085.33,2220.92 1104.41,2240 1585,2240 v1(1590,2245) 1595,2240 1728.55,2240 1735.55,2247 1750.37,2247 1757.2,2253.83 1772.8,2253.83 1777.45,2249.17 1880.83,2249.17 1895.83,2234.17 1929.17,2234.17 1948,2253 2368.68,2253 2381.68,2240 v1(2410,2240) 2465,2240 2470,2235 v1(2505,2235) ; v1(1435,2610) 1444.16,2619.16 1574.16,2619.16 v1(1580,2625) ; v1(2225,1860) 2238.37,1860 2242.2,1863.83 2257.8,1863.83 2259.63,1862 2322,1862 2352,1892 2367.52,1892 2376.37,1900.84 2393.63,1900.84 2401.63,1892.84 2418.6,1892.84 2421.6,1889.84 2485.97,1889.84 v1(2496.12,1900)
  5-SIG-VERT w6: v1(240,305) 243.83,308.83 243.83,379.55 226.17,397.2 226.17,536.17 v1(245,555) ; v1(975,2235) 990,2220 v1(990,1352.46) ; v1(1580,2625) 1580,2596.97 1572.84,2589.81 1572.84,2532.15 1562.2,2521.51 1562.2,2297.27 1590,2269.48 v1(1590,2245) ; v1(1635,550) 1650.2,534.8 1650.2,400.2 1634.16,384.16 1634.16,355.84 v1(1640,350) ; v1(2505,2235) 2500,2235 2496.12,2231.12 v1(2496.12,1900) 2496.12,1873.88 2530,1840 2530,1040 v1(2540,1030) 2530,1020 2530,867.34 2540.8,856.54 2540.8,838.8 2537,835 2537,659.17 2555,641.17 v1(2555,555)
  6-GND-BOT w6: v1(1640,350) 1640,324.17 U2.6@1640.16,324.02